# Altium PCB USBTTL.PcbDoc
Units mm, origin at the board's own origin, x right, y up, seen from the top; angles counter-clockwise.
Board outline 30 x 17 mm, 2 copper layers (Top Layer, Bottom Layer); 19 components, 16 nets, 62 pads, 0 vias.
Unrouted connection lines stored in the file: 35.
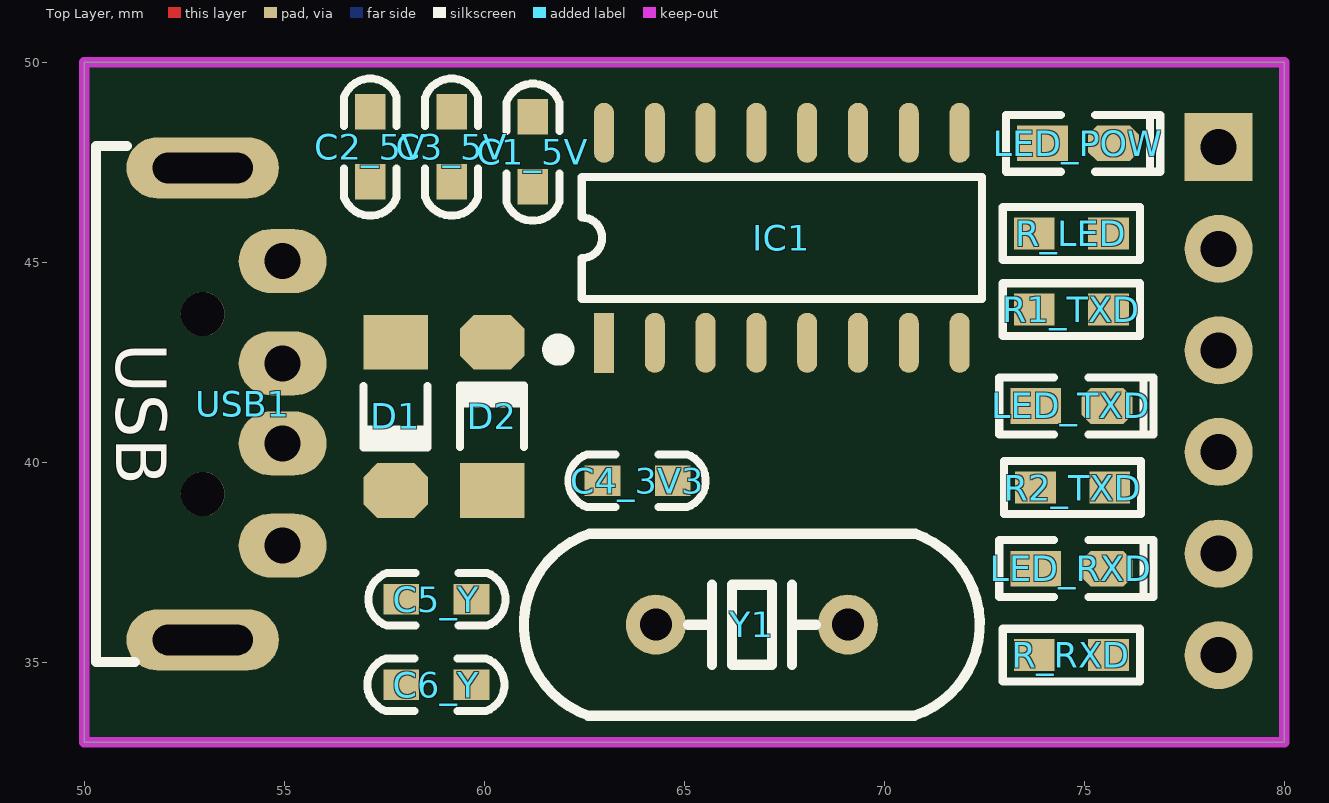
[diagram p0: Top Layer view]
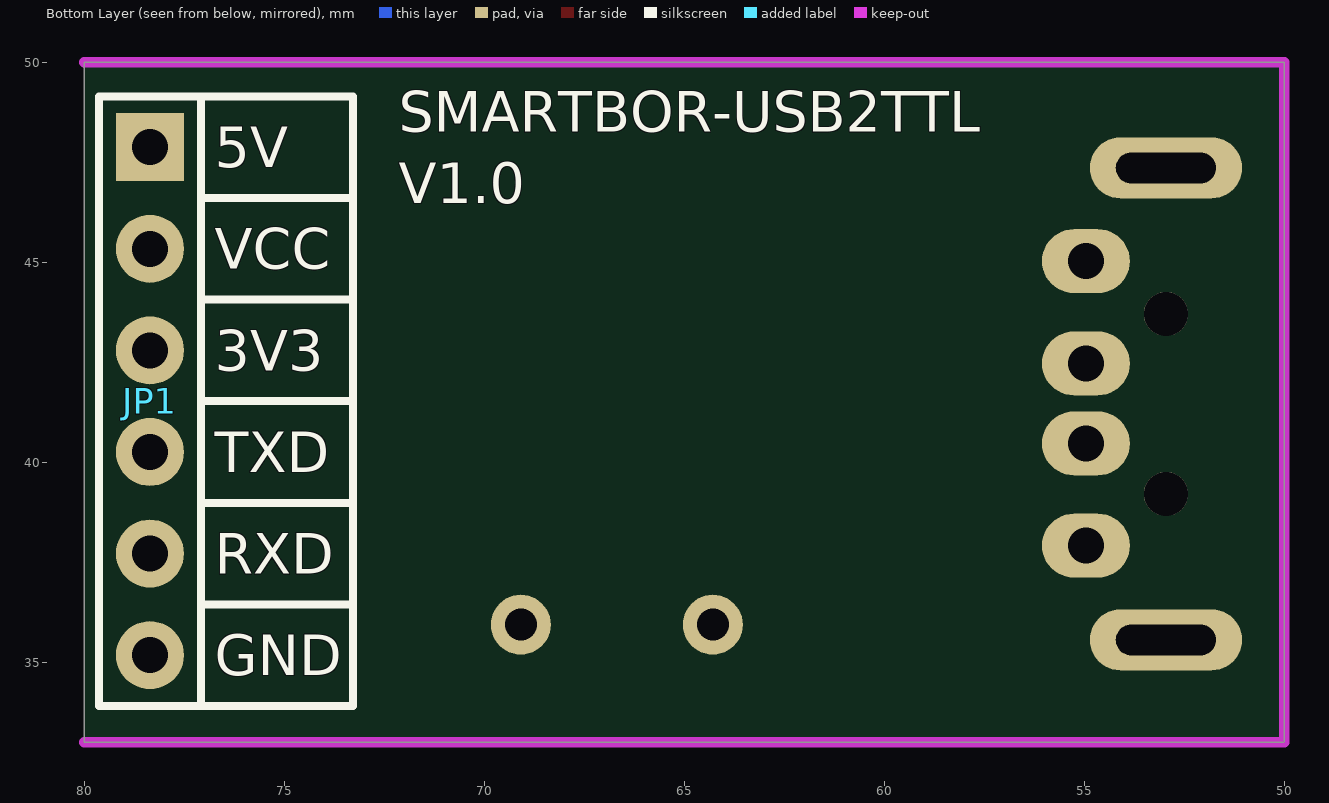
[diagram p1: Bottom Layer view, seen from below]

## Layer stack, top to bottom
Top Solder: solder mask 0.0102, Solder Resist, Dk 3.5
Top Layer: signal copper 0.0356
Dielectric 1: dielectric 0.32, FR-4, Dk 4.8
Bottom Layer: signal copper 0.0356
Bottom Solder: solder mask 0.0102, Solder Resist, Dk 3.5

## Board outline
50,33 80,33 80,50 50,50

## Design rules (kind name [scope] priority, off if disabled: settings)
Clearance [All] p1: gap=0.254 ignorepadtopadclearanceinfootprint=FALSE except(0: Arc-Hole Track-Hole SMDPad-Hole THPad-Hole Via-Hole Fill-Hole Poly-Hole Region-Hole Text-Hole)
PolygonConnect [All] p1: connectstyle=Relief reliefconductorwidth=0.254 reliefentries=4 polygonreliefangle="90 Angle" airgapwidth=0.254
RoomDefinition USBTTL [InComponentClass('USBTTL')] p1: confinementstyle=ConfineIn formatcopy=TRUE lockcomponents=FALSE outline 33.909,33.02 80,33.02 80,50.038 33.909,50.038
RoutingVias [All] p1: holewidth=0.711 width=1.27 viastyle="Through Hole" minholewidth=0.711 minwidth=1.27 maxholewidth=0.711 maxwidth=1.27
SolderMaskExpansion [All] p1: expansion=0.102 istentingtop=FALSE
Width [All] p1: maxlimit=0.254 minlimit=0.254 preferedwidth=0.254
30 further rules are at their usual default settings.

## Components (designator, comment, footprint, x,y, rotation, side; value= is the part's Value field where it differs from the comment)
C1_5V "0.1UF" "C 0603" 61.214,47.752 r270 top value=1n
C2_5V "10UF" "C 0603" 57.15,47.879 r270 top value=1n
C3_5V "0.1UF" "C 0603" 59.182,47.879 r270 top value=1n
C4_3V3 "0.1UF" "C 0603" 63.817,39.539 r180 top value=1n
C5_Y "30p" "C 0603" 58.816,36.576 r0 top value=1n
C6_Y "30p" "C 0603" 58.79,34.44 r180 top value=1n
D1 "1N4148" "MINI_MELF (LL34)" 57.785,41.148 r270 top
D2 "1N4148" "MINI_MELF (LL34)" 60.198,41.148 r90 top
IC1 "CH340G" SOP16_L 67.437,45.613 r90 top
JP1 "HDR-1X6" HDR-1X6-USBTTL 78.359,47.879 r270 bottom
LED_POW "红色" "LED 0603R" 74.841,47.969 r0 top value=1u
LED_RXD "红色" "LED 0603R" 74.676,37.338 r0 top value=1u
LED_TXD "红色" "LED 0603R" 74.676,41.402 r0 top value=1u
R1_TXD "1.5K" "R 0603" 74.676,43.815 r0 top value=1K
R2_TXD "1.5K" "R 0603" 74.706,39.37 r180 top value=1K
R_LED "1.5K" "R 0603" 74.676,45.72 r180 top value=1K
R_RXD "1.5K" "R 0603" 74.676,35.179 r0 top value=1K
USB1 "USB" USB_A/P_A 52.959,41.46 r270 top
Y1 "12MHz" "XTAL-49S DIP" 66.688,35.941 r0 top

## Footprints (in the part's own frame and the unit in brackets; to place one, negate y for a bottom-side part, rotate by r counter-clockwise, add the part's x,y. Pads: shape width x height; smd on the part's side, far side on the other; paste and mask are expansions set on the pad)
"C 0603" [mil] "无极性贴片电容"
  rect 35x30 smd: 1(-35,0) 2(34,0)
  silkscreen extent -67,-26 67,26, body extent -31,-16 31,16, height 32
HDR-1X6-USBTTL [mm] "排针，6脚"
  rect 1.7x1.7 hole 0.9: 1(0,0)
  round 1.7 hole 0.9: 2(2.54,0) 3(5.08,0) 4(7.62,0) 5(10.16,0) 6(12.7,0)
  silkscreen extent -1.27,-1.27 13.97,5.08, body extent -1.27,-1.27 13.97,1.27, height 8.5
"LED 0603R" [mil] "红色0603LED"
  rect 50x35 smd: 1(-35,0.26)
  oct 50x35 smd: 2(35,0.26)
  silkscreen extent -71,-28 81,28, body extent -31,-16 32,16, height 24
"MINI_MELF (LL34)" [mm] "1.5*3.4mm(直径，脚距）"
  rect 1.37x1.62 smd: 1(-1.855,0)
  oct 1.37x1.62 smd: 2(1.855,0)
  silkscreen extent -0.76,-0.8 0.78,0.8, body extent -1.7,-0.75 1.7,0.75, height 1.5
"R 0603" [mil] "1/10W贴片电阻"
  rect 40x31.5 smd: 1(-36.5,0) 2(36.5,0)
  silkscreen extent -68,-26 68,26, body extent -31,-16 32,16, height 16
SOP16_L [mm] "10.3*6.2*1.8mm（长宽高）"
  rect 1.5x0.5 smd: 1(-2.625,4.445)
  oval 1.5x0.5 smd: 2(-2.625,3.175) 3(-2.625,1.905) 4(-2.625,0.635) 5(-2.625,-0.635) 6(-2.625,-1.905) 7(-2.625,-3.175) 8(-2.625,-4.445) 9(2.625,-4.445) 10(2.625,-3.175) 11(2.625,-1.905) 12(2.625,-0.635) 13(2.625,0.635) 14(2.625,1.905) 15(2.625,3.175) 16(2.625,4.445)
  silkscreen extent -2.95,-5 1.52,5.74, body extent -3,-5 3,5, height 1.9
USB_A/P_A [mm] "A型USB 插头，20*13*4.5mm"
  round 1.1 hole 1.1: 0(-2.25,0) 0(2.25,0)
  oval 1.6x2.2 hole 0.9: 1(3.543,2) 2(0.987,2) 3(-1.013,2) 4(-3.569,2)
  oval 1.524x3.81 hole 0.762 slot 2.5 at 90 deg: 4(-5.9,0) 4(5.9,0)
  silkscreen extent -6.45,-2.67 6.45,-1.7, body extent -6.47,-17.9 6.47,2.1, height 3.25
"XTAL-49S DIP" [mm]
  round 1.5 hole 0.8: 1(-2.4,0) 2(2.4,0)
  silkscreen extent -5.7,-2.28 5.7,2.28, body extent -5.68,-2.35 5.68,2.3, height 3.5

## Part data
C1_5V C2_5V C3_5V C4_3V3 C5_Y C6_Y: library part C, "无极性贴片电容", BOM名称=无极性贴片电容, 学习资源=www.ooocke.com, 版权归属=源创客
D1 D2: "高速开关二极管", BOM名称=高速开关二极管, 学习资源=www.ooocke.com, 版权归属=源创客
IC1: "串口转USB", BOM名称=串口转USB, 学习资源=www.ooocke.com, 版权归属=源创客
JP1: library part "Header 6_USBTTL", "6P接插件", BOM名称=6P接插件, 学习资源=www.ooocke.com, 版权归属=源创客
LED_POW LED_RXD LED_TXD: library part LED-SMD, "贴片LED", BOM名称=贴片LED, 学习资源=www.ooocke.com, 版权归属=源创客
R1_TXD R2_TXD R_LED R_RXD: library part R, "贴片电阻", BOM名称=贴片电阻, 学习资源=www.ooocke.com, 版权归属=源创客
USB1: library part USB-A/P, "USB-A型公接口", BOM名称=USB-A型公接口, 学习资源=www.ooocke.com, 版权归属=源创客
Y1: library part XTAL-2, "2脚晶振", BOM名称=2脚晶振, 学习资源=www.ooocke.com, 版权归属=源创客

## Nets (pads, with @x,y where several pads share a name; then routed paths per layer and width w, separated by ;. In a path a pad name is that pad's centre, name@x,y a point inside that pad or via, vN(x,y) a via of type N, cw(c..) or ccw(c..) an arc to the next point about the centre after c; other vN are vias at no path point)
CH340G_3V3: C4_3V3.1 IC1.4
CH340G_RXD: IC1.3 JP1.5 LED_RXD.2
CH340G_TXD: IC1.2 JP1.4 R1_TXD.2
CH340G_VCC: IC1.16 JP1.2 R2_TXD.1 R_RXD.1
GND: C1_5V.1 C2_5V.1 C3_5V.1 C4_3V3.2 C5_Y.1 C6_Y.2 IC1.1 JP1.6 R_LED.2 USB1.4@54.959,45.029
NET_UD+: IC1.5 USB1.3
NET_UD-: IC1.6 USB1.2
NetC5_Y_2: C5_Y.2 IC1.7 Y1.1
NetC6_Y_1: C6_Y.1 IC1.8 Y1.2
NetD1_2: D1.2 D2.1
NetLED_POW_2: LED_POW.2 R_LED.1
NetLED_RXD_1: LED_RXD.1 R_RXD.2
NetLED_TXD_1: LED_TXD.1 R2_TXD.2
NetLED_TXD_2: LED_TXD.2 R1_TXD.1
VCC+3V3: C3_5V.2 D2.2 JP1.3 LED_POW.1
VCC+5V: C1_5V.2 C2_5V.2 D1.1 JP1.1 USB1.1
pads on no net: IC1.9 IC1.10 IC1.11 IC1.12 IC1.13 IC1.14 IC1.15 USB1.0 USB1.4@52.959,35.56 USB1.4@52.959,47.36

## Keep-outs
Top Layer:
  the board outline again, w0.254
Bottom Layer:
  lines w0.254: 80,33 50,33 50,50 80,50

## Silkscreen, mask and mechanical layers (free items; w line width, h text height)
Bottom Overlay:
  text "SMARTBOR-USB2TTL" at 72.136,48.26 h1.02
  text "V1.0" at 72.136,46.482 h1.02

## Text inside footprints (layer, text, board x,y; h text height)
JP1: Bottom Overlay "5V" at 76.735,47.373 h1.02; Bottom Overlay "VCC" at 76.735,44.833 h1.02; Bottom Overlay "3V3" at 76.735,42.293 h1.02; Bottom Overlay "TXD" at 76.735,39.753 h1.02; Bottom Overlay "RXD" at 76.735,37.213 h1.02; Bottom Overlay "GND" at 76.735,34.674 h1.02